# Altium PCB PA_Channel_RF2.PcbDoc
Units mm, origin at the board's own origin, x right, y up, seen from the top; angles counter-clockwise.
Board outline 40.51 x 29.51 mm, 2 copper layers (Top Layer, Bottom Layer), stack 1.071 mm thick; 21 components, 14 nets, 76 pads, 242 vias.
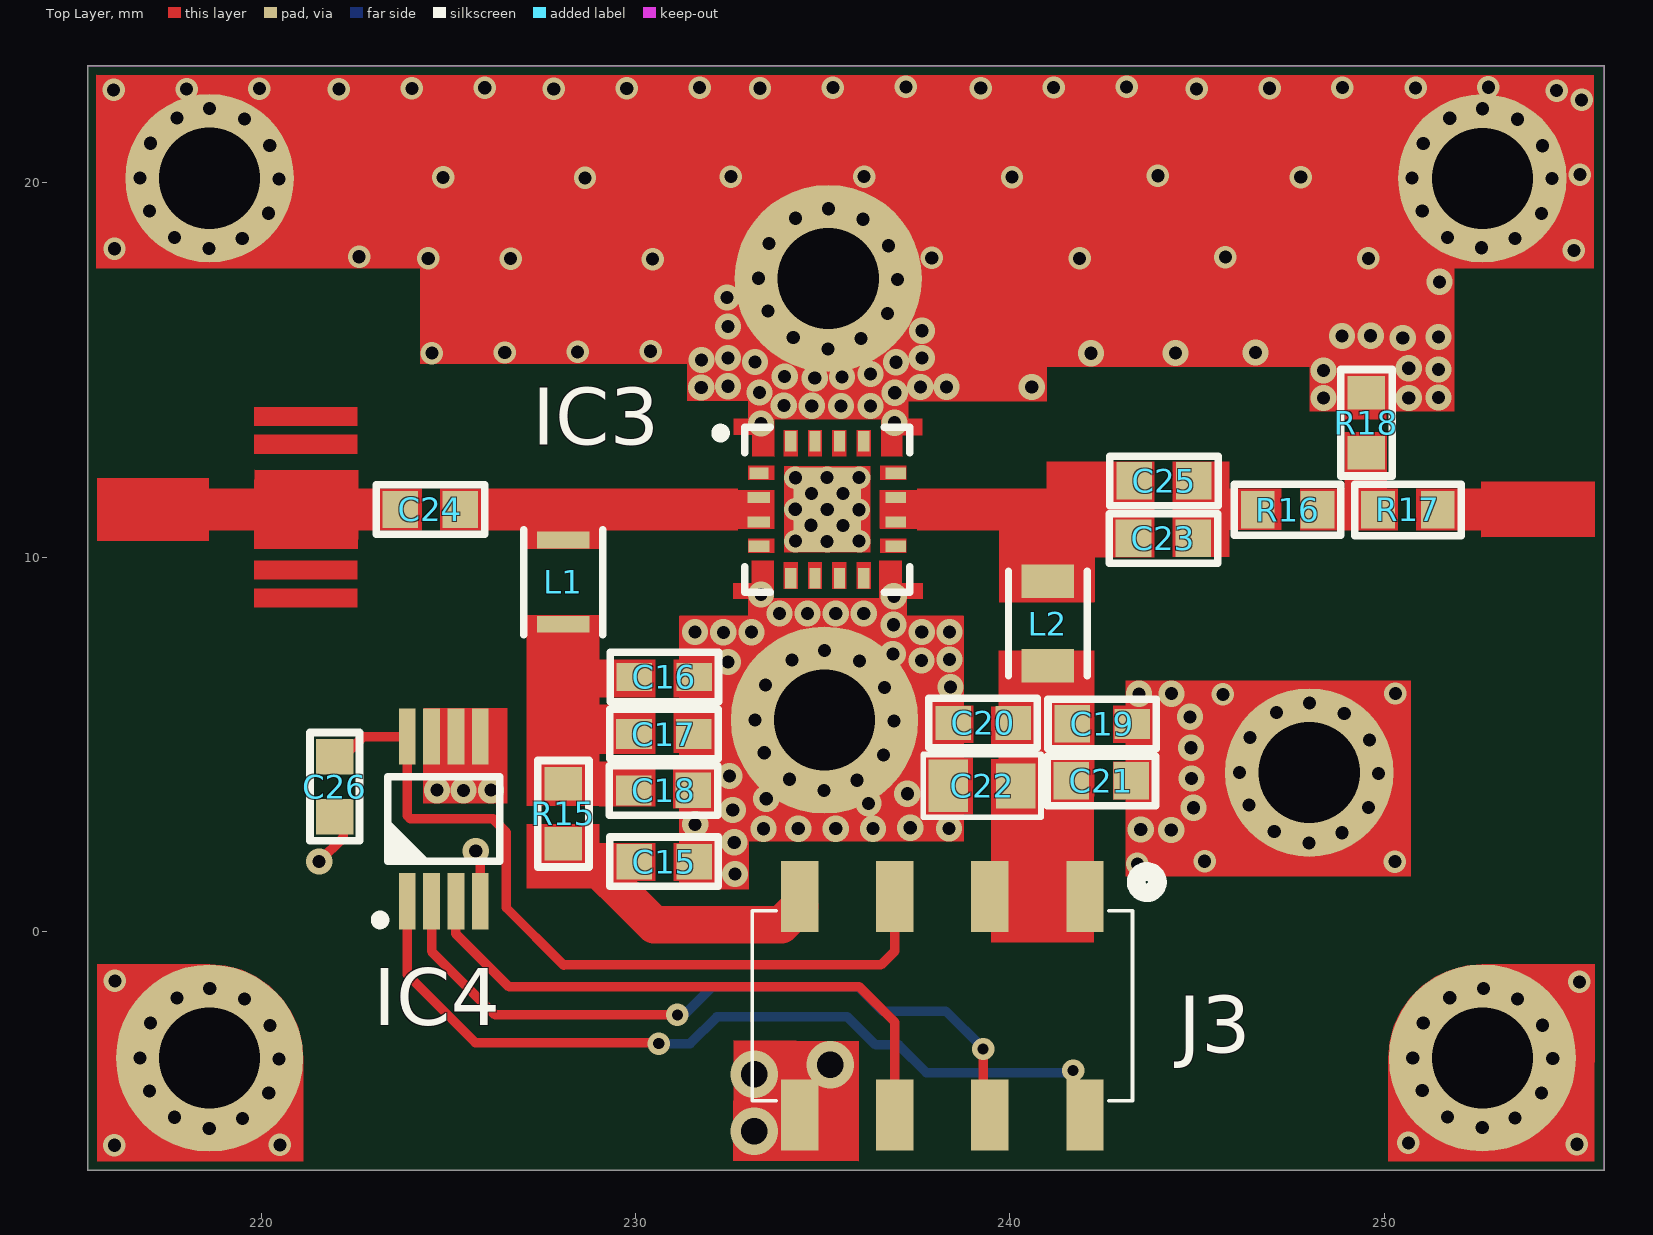
[diagram p0: Top Layer view]
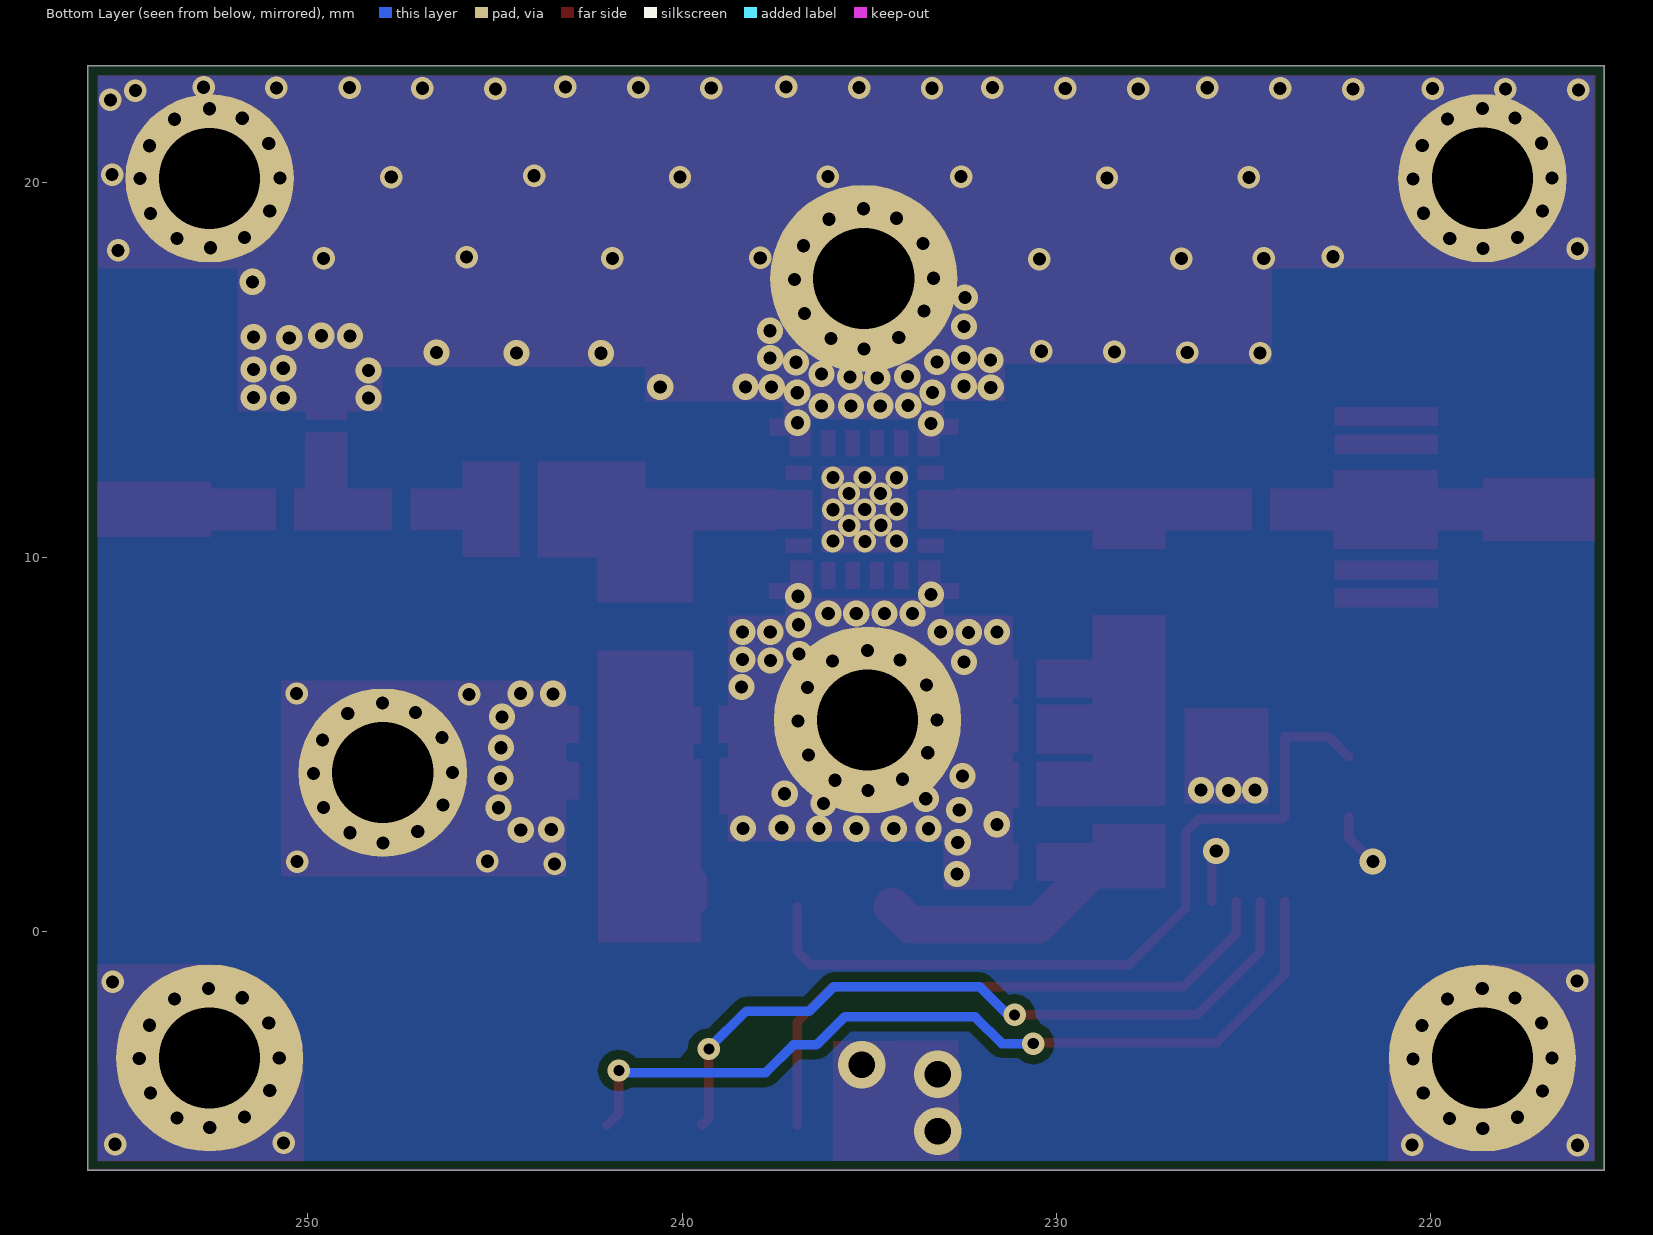
[diagram p1: Bottom Layer view, seen from below]
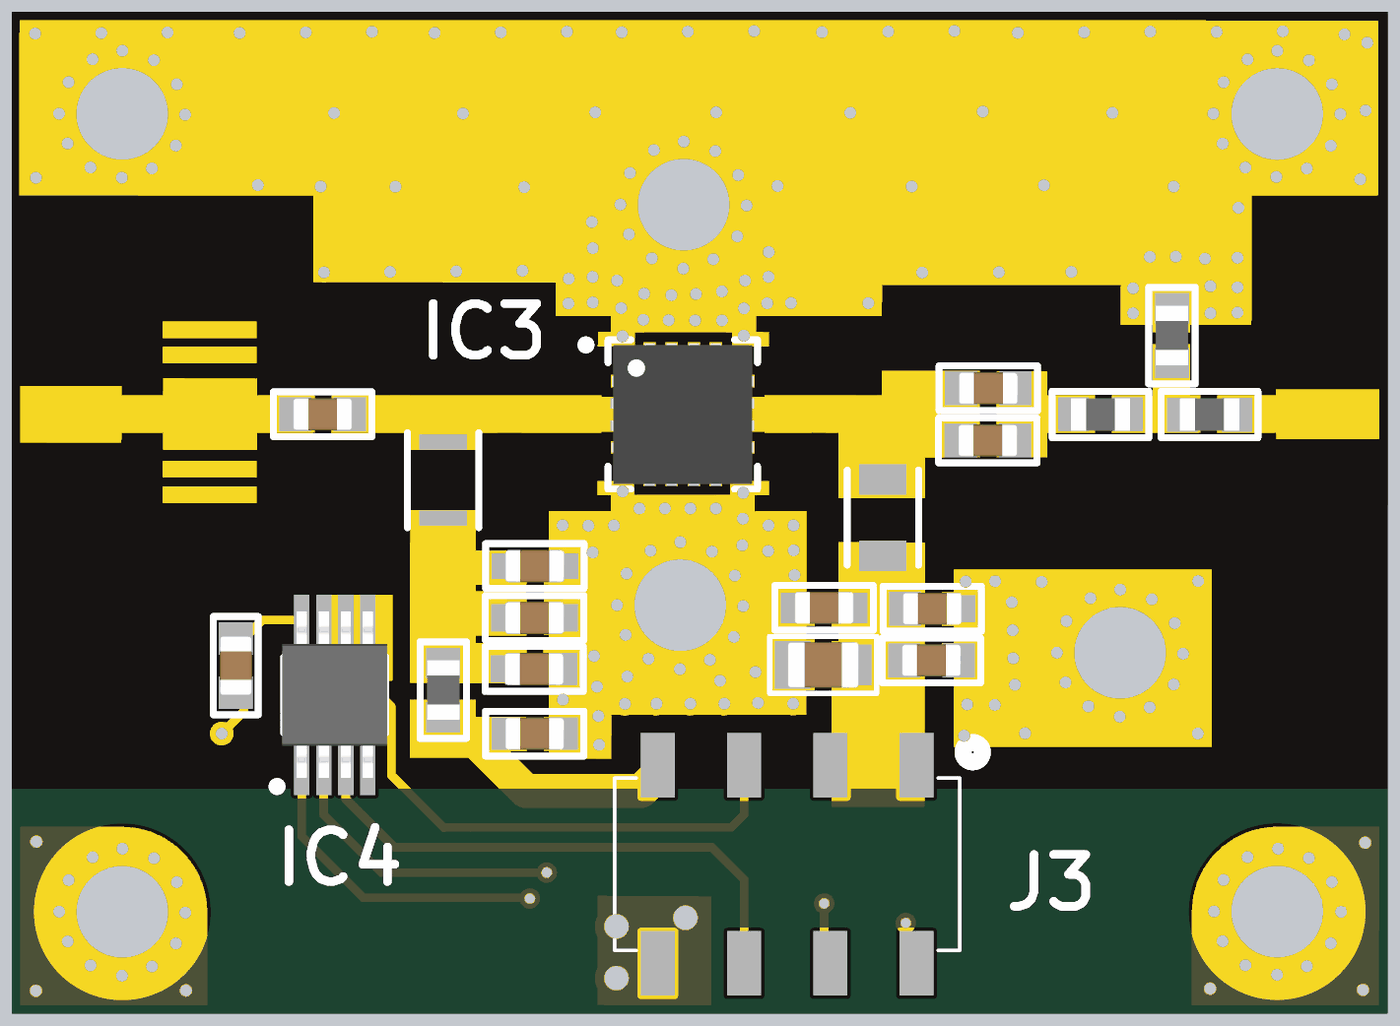
[diagram p2: 3D render of the assembled board from above, using the file's embedded part models]

## Layer stack, top to bottom
Top Solder: solder mask 0.0102, Solder Resist, Dk 3.5
Top Layer: signal copper 0.0356
Dielectric1: core 1, FR-4, Dk 4.8
Bottom Layer: signal copper 0.0356
Bottom Solder: solder mask 0.0102, Solder Resist, Dk 3.5

## Board outline
215.37,-6.375 ccw(c215.375,-6.375) 215.375,-6.38 255.875,-6.38 ccw(c255.875,-6.375) 255.88,-6.375 255.88,23.125 ccw(c255.875,23.125) 255.875,23.13 215.375,23.13 ccw(c215.375,23.125) 215.37,23.125

## Design rules (kind name [scope] priority, off if disabled: settings)
Clearance [All] p1: gap=0.25
HoleSize [All] p1: absolutevalues=TRUE maxlimit=5 minlimit=0.2 maxpercent=80.000 minpercent=20.000
HoleToHoleClearance [All] p1: gap=0.2 allowstackedmicrovias=TRUE
MinimumSolderMaskSliver [All] p1: minsoldermaskwidth=0
PolygonConnect [All] p1: connectstyle=Direct reliefconductorwidth=0.254 reliefentries=4 polygonreliefangle="90 Angle" airgapwidth=0.254
RoomDefinition Power_Stage [InComponentClass('Power_Stage')] p1: confinementstyle=ConfineIn formatcopy=TRUE lockcomponents=FALSE outline -59.9,-122.5 -9.1,-122.5 -9.1,-97.1 -59.9,-97.1
RoutingVias [All] p1: holewidth=0.711 width=1.27 viastyle="Through Hole" minholewidth=0.2 minwidth=0.5 maxholewidth=0.711 maxwidth=1.27
SilkToSolderMaskClearance [IsPad] p1: minsilkscreentomaskgap=0 clearancetoexposedcopper=TRUE
SolderMaskExpansion [All] p1: expansion=0.102
Width [All] p1: maxlimit=2 minlimit=0.152 preferedwidth=0.254
26 further rules are at their usual default settings.

## Components (designator, comment, footprint, x,y, rotation, side; value= is the part's Value field where it differs from the comment)
C15 "4.7u" 0603C#1 230.766,1.868 r0 top
C16 "10n" 0603C#2 230.77,6.805 r0 top
C17 "1n" 0603C#3 230.762,5.278 r0 top
C18 "100p" 0603C#4 230.75,3.773 r0 top
C19 "10n" 0603C#5 242.47,5.548 r0 top
C20 "1n" 0603C#6 239.288,5.575 r180 top
C21 "100p" 0603C#7 242.444,4.028 r0 top
C22 "10u/50V" 0805C 239.26,3.893 r180 top
C23 "680n" 0603C#7 244.106,10.505 r0 top
C24 "680n" 0603C#7 224.522,11.277 r0 top
C25 "1n" 0603C#7 244.12,12.041 r0 top
C26 "10n" 0603C#7 221.968,3.872 r90 top
IC3 "MMWX1" QFN65P400X400X80_HS-17N 235.125,11.27 r0 top
IC4 "MCP9801-M/MS" SOP65P490X110-8N 224.88,3.011 r90 top
J3 "ZL264-8DG" ZL264-8DG 238.2,-1.98 r180 top
L1 "1uH" INDP2520X18L#1 228.071,9.335 r90 top
L2 "1uH" INDP2520X18L#2 241.016,8.231 r90 top
R15 "33" 0603R 228.075,3.15 r270 top
R16 "4.87R" 0603R 247.423,11.27 r0 top
R17 "4.87R" 0603R 250.635,11.266 r0 top
R18 "1k" 0603R 249.528,13.594 r270 top

## Footprints (in the part's own frame and the unit in brackets; to place one, negate y for a bottom-side part, rotate by r counter-clockwise, add the part's x,y. Pads: shape width x height; smd on the part's side, far side on the other; paste and mask are expansions set on the pad)
0603C#1 [mm]
  rect 0.95x0.95 smd: 1(-0.8,0) 2(0.8,0)
  silkscreen extent -1.45,-0.66 1.45,0.66, body extent -0.87,-0.47 0.88,0.48, height 0.87
0603C#2 [mm]
  rect 0.95x0.75 smd: 1(-0.8,0) 2(0.8,0)
  silkscreen extent -1.45,-0.66 1.45,0.66, body extent -0.87,-0.47 0.88,0.48, height 0.87
0603C#3 [mm]
  rect 0.95x0.8 smd: 1(-0.8,0) 2(0.8,0)
  silkscreen extent -1.45,-0.66 1.45,0.66, body extent -0.87,-0.47 0.88,0.48, height 0.87
0603C#4 [mm]
  rect 0.95x0.8 smd: 1(-0.8,0)
  rect 0.95x0.95 smd: 2(0.8,0)
  silkscreen extent -1.45,-0.66 1.45,0.66, body extent -0.87,-0.47 0.88,0.48, height 0.87
0603C#5 [mm]
  rect 0.95x1 smd: 1(-0.8,0)
  rect 0.95x0.8 smd: 2(0.8,0)
  silkscreen extent -1.45,-0.66 1.45,0.66, body extent -0.87,-0.47 0.88,0.48, height 0.87
0603C#6 [mm]
  rect 0.95x0.9 smd: 1(-0.8,0) 2(0.8,0)
  silkscreen extent -1.45,-0.66 1.45,0.66, body extent -0.87,-0.47 0.88,0.48, height 0.87
0603C#7 [mm]
  rect 0.95x1 smd: 1(-0.8,0) 2(0.8,0)
  silkscreen extent -1.45,-0.66 1.45,0.66, body extent -0.87,-0.47 0.88,0.48, height 0.87
0603R [mm]
  rect 0.9x1 smd: 1(-0.8,0) 2(0.8,0)
  silkscreen extent -1.42,-0.69 1.42,0.69, body extent -0.87,-0.47 0.88,0.48, height 0.55
0805C [mm]
  rect 1.05x1.2 smd: 1(-0.9,0)
  rect 1.05x1.4 smd: 2(0.9,0)
  silkscreen extent -1.57,-0.84 1.57,0.84, body extent -1.05,-0.67 1.05,0.68, height 1.25
INDP2520X18L#1 [mm] "Precision Wire Wound Inductor, 2-Leads, Body 2.5x2.0mm, IPC High Density"
  rect 0.45x1.4 smd: 1(-1.125,0) 2(1.125,0)
  silkscreen extent -1.4,-1.05 1.4,1.05, body extent -1.35,-1.05 1.35,1.05, height 1.8
INDP2520X18L#2 [mm] "Precision Wire Wound Inductor, 2-Leads, Body 2.5x2.0mm, IPC High Density"
  rect 0.9x1.4 smd: 1(-1.125,0) 2(1.125,0)
  silkscreen extent -1.4,-1.05 1.4,1.05, body extent -1.35,-1.05 1.35,1.05, height 1.8
QFN65P400X400X80_HS-17N [mm] "QFN, 16-Leads, Body 4.00x4.00mm, Pitch 0.65mm, Thermal Pad 2.25x2.25mm, IPC Medium Density"
  rect 0.5x0.3 smd: 1(-1.825,0.975)
  rect 0.6x0.3 smd: 2(-1.825,0.325) 3(-1.825,-0.325)
  rect 0.55x0.3 smd: 4(-1.825,-0.975) 9(1.825,-0.975) 10(1.825,-0.325) 11(1.825,0.325) 12(1.825,0.975)
  rect 0.3x0.55 smd: 5(-0.975,-1.825) 6(-0.325,-1.825) 7(0.325,-1.825) 8(0.975,-1.825) 13(0.975,1.825) 14(0.325,1.825) 15(-0.325,1.825) 16(-0.975,1.825)
  rect 1.8x2.25 smd: 17(0,0)
  silkscreen extent -2.97,-2.2 2.2,2.2, body extent -2.07,-2.07 2.07,2.07, height 0.8
SOP65P490X110-8N [mm] "SOP, 0.65mm pitch; 8 pin, 3.00mm W X 3.00mm L X 1.10mm H body, IPC Medium Density"
  rect 1.5x0.45 smd: 1(-2.2,0.975) 2(-2.2,0.325) 3(-2.2,-0.325) 4(-2.2,-0.975) 5(2.2,-0.975) 6(2.2,-0.325) 7(2.2,0.325) 8(2.2,0.975)
  silkscreen extent -2.82,-1.5 1.12,1.82, body extent -2.45,-1.55 2.45,1.55, height 1.1
ZL264-8DG [mm]
  rect 1x1.9 smd: 1(-3.81,-2.921) 2(-3.81,2.921) 3(-1.27,-2.921) 4(-1.27,2.921) 5(1.27,-2.921) 6(1.27,2.921) 7(3.81,-2.921) 8(3.81,2.921)
  silkscreen extent -5.74,-3.59 5.08,2.54, body extent -5.08,-3.56 5.08,3.56, height 7.5

## Part data
C15 C16 C17 C18 C19 C20 C21 C23 C24 C25 C26: library part CAP_SMD_0603, "Capacitor SMD"
C22: library part CAP_SMD_0805, "Capacitor SMD"
IC3: library part RF_NPA1003QA
IC4: "2-Wire High-Accuracy Temperature Sensor"
J3: library part "CON_2X4 2.54 SMT FEM", "2.54mm pitch connector"
L2: "100uH, 60mA, 21R"
R15 R16 R17 R18: library part RES_0603, "SMD Resistor"

## Free pads (board coordinates)
  round 5 hole 2.7 unplated: 2(235.05,5.65) 6(218.626,-3.38) 6(252.625,-3.375) 13(235.15,17.45)
  round 4.5 hole 2.7 unplated: 4(248,4.25) 6(218.623,20.125) 6(252.625,20.122)

## Via types
v1: diameter 0.7, hole 0.35, Top Layer to Bottom Layer, tented both sides, 167 vias
v2: diameter 0.6, hole 0.35, Top Layer to Bottom Layer, tented both sides, 68 vias
v3: diameter 0.6, hole 0.3, Top Layer to Bottom Layer, tented both sides, 4 vias
v4: diameter 1.27, hole 0.711, Top Layer to Bottom Layer, tented both sides, 3 vias

## Nets (pads, with @x,y where several pads share a name; then routed paths per layer and width w, separated by ;. In a path a pad name is that pad's centre, name@x,y a point inside that pad or via, vN(x,y) a via of type N, cw(c..) or ccw(c..) an arc to the next point about the centre after c; other vN are vias at no path point)
ALERT: IC4.3 J3.6 | length 16.3
  Top Layer w0.254: IC4.3 225.205,-0.059 226.623,-1.477 235.985,-1.477 236.93,-2.422 J3.6@236.93,-5.171
GND: C15.2 C16.2 C17.2 C18.2 C19.2 C20.2 C21.2 C22.2 C26.1 IC3.17 IC4.4 IC4.5 IC4.6 IC4.7 J3.8 pad.2 pad.4 pad.6 pad.13 R18.1 | length 4.1
  Top Layer w0.254: v1(221.551,1.87) 222.2,2.519 C26.1@222.2,3.071 ; v1(225.733,2.153) 225.855,2.031 IC4.4
  Top Layer w1: v4(233.172,-5.334) 234.227,-5.334 J3.8@234.39,-5.171
  other v1: 218.616,-5.261 252.621,-5.235 219.498,-4.988 253.498,-4.982 217.692,-4.959 251.691,-4.954 220.205,-4.314 254.204,-4.308 217.018,-4.253 251.017,-4.247 220.479,-3.405 216.765,-3.376 250.765,-3.371 254.506,-3.384 220.233,-2.507 254.232,-2.502 217.046,-2.446 251.046,-2.441 219.559,-1.801 253.559,-1.795 217.753,-1.773 251.752,-1.767 218.629,-1.52 252.65,-1.521 232.663,1.54 247.99,2.369 232.64,2.385 248.873,2.643 247.066,2.671 243.499,2.727 244.313,2.716 233.422,2.747 234.35,2.75 235.35,2.75 236.35,2.75 238.376,2.753 237.341,2.775 231.596,2.866 232.6,3.25 244.905,3.308 249.579,3.316 246.393,3.377 236.222,3.428 233.494,3.55 237.263,3.683 225.409,3.775 235.04,3.769 224.701,3.779 226.138,3.779 235.923,4.043 234.116,4.071 244.855,4.089 232.515,4.154 249.854,4.225 246.14,4.254 236.629,4.716 233.443,4.777 244.838,4.913 249.608,5.123 246.421,5.184 236.904,5.625 233.19,5.654 244.811,5.738 248.934,5.829 247.127,5.858 248.004,6.11 243.454,6.352 244.321,6.356 236.658,6.523 238.415,6.539 233.471,6.584 232.474,7.205 235.984,7.229 237.641,7.247 234.177,7.258 238.391,7.268 236.875,7.419 235.054,7.51 231.588,8.007 232.348,7.995 233.1,8 237.648,8.003 238.387,8.003 236.896,8.199 233.85,8.5 234.6,8.5 235.35,8.5 236.1,8.5 236.903,8.958 233.356,9.004 233.351,13.576 236.921,13.595 233.964,14.057 234.711,14.046 235.488,14.039 236.281,14.038 248.382,14.251 250.659,14.251 251.456,14.271 233.313,14.404 236.928,14.394 231.758,14.539 232.476,14.569 237.611,14.547 238.311,14.554 240.587,14.55 234.79,14.785 235.515,14.819 233.987,14.83 236.279,14.896 248.382,14.988 251.456,15.015 250.659,15.049 233.19,15.217 236.959,15.211 231.768,15.267 232.471,15.322 237.651,15.322 242.173,15.45 244.43,15.46 246.566,15.469 235.14,15.569 236.023,15.843 250.499,15.859 234.216,15.871 251.456,15.886 248.878,15.912 249.641,15.919 237.657,16.053 232.476,16.169 236.729,16.516 233.543,16.577 232.449,16.938 251.483,17.359 237.004,17.425 233.29,17.454 218.613,18.244 252.6,18.268 236.758,18.323 233.571,18.384 219.495,18.518 253.498,18.515 217.689,18.546 251.691,18.543 236.084,19.029 234.277,19.058 220.202,19.192 254.204,19.188 217.015,19.253 251.018,19.249 235.154,19.31 220.476,20.101 216.763,20.129 250.744,20.132 254.485,20.118 254.233,20.995 220.23,20.998 217.043,21.059 251.046,21.056 219.556,21.705 253.559,21.701 217.75,21.733 251.752,21.73 218.626,21.986 252.629,21.982
  other v2: 216.082,-5.706 220.502,-5.697 255.15,-5.68 250.65,-5.643 255.216,-1.344 216.095,-1.315 243.408,1.809 245.203,1.879 250.289,1.872 245.691,6.337 250.3,6.361 234.273,10.43 235.118,10.427 235.973,10.43 234.695,10.857 235.542,10.848 234.27,11.284 235.125,11.277 235.97,11.27 234.7,11.702 235.545,11.706 234.274,12.126 235.122,12.131 235.975,12.13 224.561,15.454 226.509,15.471 228.457,15.488 230.405,15.505 230.459,17.964 224.465,17.984 226.667,17.979 237.916,18 241.865,17.986 249.579,17.983 245.761,18.02 222.617,18.028 255.07,18.197 216.084,18.242 224.861,20.15 228.653,20.135 240.059,20.157 247.773,20.154 232.549,20.169 236.11,20.171 243.955,20.191 255.23,20.223 255.277,22.221 254.606,22.467 216.06,22.488 218.008,22.505 222.079,22.509 227.819,22.511 244.991,22.513 219.956,22.522 224.027,22.526 225.975,22.543 229.767,22.528 231.715,22.545 233.328,22.53 239.225,22.533 246.939,22.53 250.84,22.54 235.276,22.547 237.224,22.564 241.173,22.55 243.121,22.567 248.887,22.547 252.788,22.557
  other v4: 233.172,-3.81 235.204,-3.556
NetC16_1: C16.1 C17.1 C18.1 L1.1 R15.1
NetC23_1: C23.1 C25.1 IC3.10 IC3.11 L2.2
NetC23_2: C23.2 C25.2 R16.1
NetC24_1: C24.1
NetC24_2: C24.2 IC3.2 IC3.3 L1.2
NetR16_2: R16.2 R17.1 R18.2
NetR17_2: R17.2
P3V3: C26.2 IC4.8 J3.5 | length 21.3
  Top Layer w0.254: C26.2@222.2,4.671 222.74,5.211 IC4.8 223.905,3.096 223.988,3.013 226.195,3.013 226.548,2.66 226.548,0.639 228.09,-0.903 228.09,-0.891 236.559,-0.891 236.93,-0.52 J3.5@236.93,0.671
SCK: IC4.2 J3.4 | length 19.9
  Top Layer w0.254: IC4.2 224.555,-0.527 226.253,-2.225 v3(231.121,-2.225) ; v3(239.288,-3.136) 239.288,-4.989 239.47,-5.171 J3.4@239.492,-5.149
  Bottom Layer w0.254: v3(231.121,-2.225) 231.299,-2.225 232.054,-1.47 235.947,-1.47 236.601,-2.124 238.291,-2.124 239.28,-3.113 239.28,-3.128 v3(239.288,-3.136)
SDA: IC4.1 J3.2 | length 23
  Top Layer w0.254: IC4.1 223.905,-1.147 225.727,-2.969 v3@230.61,-2.969 ; v3(241.69,-3.71) 241.69,-4.851 J3.2@242.01,-5.171
  Bottom Layer w0.254: v3(230.622,-2.99) 231.46,-2.99 232.174,-2.276 235.664,-2.276 236.414,-3.026 237.028,-3.026 237.77,-3.768 241.632,-3.768 v3(241.69,-3.71)
VCC_PWRAMP: C19.1 C20.1 C21.1 C22.1 J3.1 J3.3 L2.1 | length 7
  Top Layer w0.254: J3.3@239.47,0.671 239.47,1.47 240.16,2.16 C22.1 ; C21.1 241.644,1.606 242.01,1.24 J3.1@242.01,0.671
VCC_PWRAMPIN: C15.1 J3.7 R15.2 | length 7.4
  Top Layer w0.254: R15.2 R15.2@228.333,2.35
  Top Layer w1: R15.2@228.333,2.35 230.503,0.18 233.899,0.18 J3.7@234.39,0.671
pads on no net: IC3.1 IC3.4 IC3.5 IC3.6 IC3.7 IC3.8 IC3.9 IC3.12 IC3.13 IC3.14 IC3.15 IC3.16

## Polygon pours and split planes (outlines as drawn)
GND on Bottom Layer "L3-No Net" (solid, remove dead copper, pour order 16): 213.354,25.03 258.133,25.03 258.133,-6.882 213.384,-6.714
no net on Top Layer "Top Layer-No Net 7" (none, pour order 9): 247.052,3.725 246.971,3.898 246.922,4.082 246.905,4.272 246.922,4.462 246.971,4.646 247.052,4.819 247.161,4.976 247.296,5.111 247.453,5.22 247.626,5.301 247.81,5.35 248,5.367 248.19,5.35 248.374,5.301 248.547,5.22 248.704,5.111 248.839,4.976 248.948,4.819 249.029,4.646 249.078,4.462 249.095,4.272 249.078,4.082 249.029,3.898 248.948,3.725 248.839,3.568 248.704,3.433 248.547,3.324 248.374,3.243 248.19,3.194 248,3.177 247.81,3.194 247.626,3.243 247.453,3.324 247.296,3.433 247.161,3.568
no net on Top Layer "Top Layer-No Net 7" (none, pour order 14): 234.102,5.125 234.021,5.298 233.972,5.482 233.955,5.672 233.972,5.862 234.021,6.046 234.102,6.219 234.211,6.376 234.346,6.511 234.503,6.62 234.676,6.701 234.86,6.75 235.05,6.767 235.24,6.75 235.424,6.701 235.597,6.62 235.754,6.511 235.889,6.376 235.998,6.219 236.079,6.046 236.128,5.862 236.145,5.672 236.128,5.482 236.079,5.298 235.998,5.125 235.889,4.968 235.754,4.833 235.597,4.724 235.424,4.643 235.24,4.594 235.05,4.577 234.86,4.594 234.676,4.643 234.503,4.724 234.346,4.833 234.211,4.968
no net on Top Layer "Top Layer-No Net 7" (none, pour order 15): 234.202,16.925 234.121,17.098 234.072,17.282 234.055,17.472 234.072,17.662 234.121,17.846 234.202,18.019 234.311,18.176 234.446,18.311 234.603,18.42 234.776,18.501 234.96,18.55 235.15,18.567 235.34,18.55 235.524,18.501 235.697,18.42 235.854,18.311 235.989,18.176 236.098,18.019 236.179,17.846 236.228,17.662 236.245,17.472 236.228,17.282 236.179,17.098 236.098,16.925 235.989,16.768 235.854,16.633 235.697,16.524 235.524,16.443 235.34,16.394 235.15,16.377 234.96,16.394 234.776,16.443 234.603,16.524 234.446,16.633 234.311,16.768
no net on Top Layer "Top Layer-No Net 7" (none, pour order 13): 217.674,19.6 217.594,19.773 217.545,19.957 217.528,20.147 217.545,20.337 217.594,20.522 217.674,20.695 217.784,20.851 217.919,20.986 218.075,21.096 218.248,21.176 218.433,21.225 218.623,21.242 218.813,21.225 218.997,21.176 219.17,21.096 219.326,20.986 219.461,20.851 219.571,20.695 219.652,20.522 219.7,20.337 219.717,20.147 219.7,19.957 219.652,19.773 219.571,19.6 219.461,19.444 219.326,19.309 219.17,19.199 218.997,19.118 218.813,19.07 218.623,19.053 218.433,19.07 218.248,19.118 218.075,19.199 217.919,19.309 217.784,19.444
no net on Top Layer "Top Layer-No Net 7" (none, pour order 12): 217.677,-3.905 217.597,-3.732 217.548,-3.548 217.531,-3.358 217.548,-3.168 217.597,-2.984 217.677,-2.811 217.787,-2.654 217.922,-2.519 218.078,-2.41 218.251,-2.329 218.435,-2.28 218.626,-2.263 218.816,-2.28 219,-2.329 219.173,-2.41 219.329,-2.519 219.464,-2.654 219.574,-2.811 219.654,-2.984 219.703,-3.168 219.72,-3.358 219.703,-3.548 219.654,-3.732 219.574,-3.905 219.464,-4.062 219.329,-4.197 219.173,-4.306 219,-4.387 218.816,-4.436 218.626,-4.453 218.435,-4.436 218.251,-4.387 218.078,-4.306 217.922,-4.197 217.787,-4.062
no net on Top Layer "Top Layer-No Net 7" (none, pour order 11): 253.15,-4.323 252.977,-4.403 252.793,-4.452 252.603,-4.469 252.413,-4.452 252.229,-4.403 252.056,-4.323 251.899,-4.213 251.764,-4.078 251.655,-3.922 251.574,-3.749 251.525,-3.565 251.508,-3.375 251.525,-3.184 251.574,-3 251.655,-2.827 251.764,-2.671 251.899,-2.536 252.056,-2.426 252.229,-2.346 252.413,-2.297 252.603,-2.28 252.793,-2.297 252.977,-2.346 253.15,-2.426 253.307,-2.536 253.442,-2.671 253.551,-2.827 253.632,-3 253.681,-3.184 253.698,-3.375 253.681,-3.565 253.632,-3.749 253.551,-3.922 253.442,-4.078 253.307,-4.213
no net on Top Layer "Top Layer-No Net 7" (none, pour order 10): 252.1,21.07 252.273,21.151 252.457,21.2 252.647,21.217 252.837,21.2 253.021,21.151 253.194,21.07 253.351,20.961 253.486,20.826 253.595,20.669 253.676,20.496 253.725,20.312 253.742,20.122 253.725,19.932 253.676,19.748 253.595,19.575 253.486,19.418 253.351,19.283 253.194,19.174 253.021,19.093 252.837,19.044 252.647,19.027 252.457,19.044 252.273,19.093 252.1,19.174 251.943,19.283 251.808,19.418 251.699,19.575 251.618,19.748 251.569,19.932 251.552,20.122 251.569,20.312 251.618,20.496 251.699,20.669 251.808,20.826 251.943,20.961

## Keep-outs
Keep-Out Layer:
  lines w0.01: 215.375,-6.375 215.375,23.125 ; 215.375,-6.375 255.875,-6.375 255.875,23.125 215.375,23.125 ; 215.375,-6.375 215.375,23.125

## Other copper
Top Layer:
  region: 236.539,12.07 236.539,12.44 237.239,12.44 237.239,12.07
  region: 236.539,12.07 236.539,12.44 237.239,12.44 237.239,12.07
  region: 233.964,12.695 233.964,13.395 234.334,13.395 234.334,12.695
  region: 234.614,12.695 234.614,13.395 234.984,13.395 234.984,12.695
  region: 235.264,12.695 235.264,13.395 235.634,13.395 235.634,12.695
  region: 235.914,12.695 235.914,13.395 236.284,13.395 236.284,12.695
  region: 233.964,12.695 233.964,13.395 234.334,13.395 234.334,12.695
  region: 234.614,12.695 234.614,13.395 234.984,13.395 234.984,12.695
  region: 235.264,12.695 235.264,13.395 235.634,13.395 235.634,12.695
  region: 235.914,12.695 235.914,13.395 236.284,13.395 236.284,12.695
  region net GND: 238.019,5.04 239.019,5.04 239.019,6.04 238.019,6.04
  region: 233.964,9.165 233.964,9.865 234.334,9.865 234.334,9.165
  region: 234.614,9.165 234.614,9.865 234.984,9.865 234.984,9.165
  region: 235.264,9.165 235.264,9.865 235.634,9.865 235.634,9.165
  region: 235.914,9.165 235.914,9.865 236.284,9.865 236.284,9.165
  region: 233.009,10.12 233.009,10.49 233.709,10.49 233.709,10.12
  region: 236.539,10.12 236.539,10.49 237.239,10.49 237.239,10.12
  region: 233.009,12.07 233.009,12.44 233.709,12.44 233.709,12.07
  region net GND: 233.974,10.13 233.974,12.43 236.274,12.43 236.274,10.13
  region: 219.814,13.518 222.574,13.518 222.574,14.014 219.814,14.014
  region: 219.814,12.772 219.814,13.268 222.574,13.268 222.574,12.772
  region: 219.815,9.407 222.575,9.407 222.575,9.903 219.815,9.903
  region: 219.815,8.661 219.815,9.157 222.575,9.157 222.575,8.661
  region net GND: 231.029,6.26 231.029,7.26 232.029,7.26 232.029,6.26
  region net GND: 231.028,4.782 232.028,4.782 232.028,6.062 231.028,6.062
  region net GND: 231.015,3.29 231.015,4.537 232.015,4.537 232.015,3.29
  region net GND: 231.029,1.36 232.029,1.36 232.029,2.36 231.029,2.36
  region: 233.964,9.165 233.964,9.865 234.334,9.865 234.334,9.165
  region: 234.614,9.165 234.614,9.865 234.984,9.865 234.984,9.165
  region: 235.264,9.165 235.264,9.865 235.634,9.865 235.634,9.165
  region: 235.914,9.165 235.914,9.865 236.284,9.865 236.284,9.165
  region: 233.009,10.12 233.009,10.49 233.709,10.49 233.709,10.12
  region: 236.539,10.12 236.539,10.49 237.239,10.49 237.239,10.12
  region: 233.009,12.07 233.009,12.44 233.709,12.44 233.709,12.07
  region net GND: 233.974,10.13 233.974,12.43 236.274,12.43 236.274,10.13
  region net GND: 238.012,3.141 239.012,3.141 239.012,4.641 238.012,4.641
  region net GND: 231.029,1.36 232.029,1.36 232.029,2.36 231.029,2.36
  region net GND: 231.029,1.36 232.029,1.36 232.029,2.36 231.029,2.36
  region net GND: 242.759,5.04 243.759,5.04 243.759,6.04 242.759,6.04
  region net GND: 242.759,3.54 243.759,3.54 243.759,4.54 242.759,4.54
  region net GND: 243.096,1.476 243.096,6.703 250.705,6.703 250.705,4.502 250.705,1.476
  region net NetC23_2: 244.359,10.01 244.359,12.55 245.859,12.55 245.859,10.01
  region net GND: 248.959,13.69 250.059,13.69 250.059,14.19 248.959,14.19
  region net NetC23_2: 245.859,10.73 247.259,10.73 247.259,11.83 245.859,11.83
  region net NetC16_1: 227.093,3.36 229.029,3.355 230.526,3.355 230.532,4.536 229.034,4.542 229.034,4.754 230.527,4.754 230.534,6.06 229.034,6.065 229.034,6.255 230.529,6.255 230.534,7.26 229.034,7.265 229.034,8.45 227.099,8.455
  region net VCC_PWRAMP: 239.51,3.103 239.51,-0.283 242.248,-0.289 242.255,7.501 239.71,7.507 239.705,6.007 239.51,6.007 239.505,5.001 239.705,4.996 239.705,4.598 239.509,4.598
  region net NetC23_2: 245.859,10.73 247.259,10.73 247.259,11.83 245.859,11.83
  region net GND: 248.959,13.69 250.059,13.69 250.059,14.19 248.959,14.19
  region net NetC23_2: 244.359,10.01 244.359,12.55 245.859,12.55 245.859,10.01
  region net GND: 224.331,3.423 226.582,3.423 226.582,5.961 224.339,5.961
  region net GND: 235.966,-6.137 235.966,-2.924 232.622,-2.907 232.613,-6.127
  region net NetC24_1: 215.624,10.442 218.598,10.44 218.603,10.725 219.823,10.725 219.823,10.23 222.589,10.225 222.594,10.725 224.289,10.725 224.294,11.83 222.594,11.835 222.594,12.33 219.829,12.335 219.823,11.835 218.603,11.835 218.603,12.115 215.624,12.115
  region net NetR17_2: 252.598,10.54 252.592,10.725 250.859,10.725 250.853,11.83 252.592,11.835 252.592,12.015 255.626,12.015 255.626,10.542
  region net GND: 250.108,-6.131 255.62,-6.133 255.63,-0.875 252.613,-0.875 252.179,-0.913 251.757,-1.027 251.361,-1.211 251.003,-1.461 250.695,-1.77 250.444,-2.128 250.26,-2.523 250.146,-2.945 250.108,-3.38
  region net GND: 215.619,-6.131 221.123,-6.133 221.128,-3.378 221.09,-2.943 220.977,-2.521 220.793,-2.125 220.542,-1.768 220.234,-1.459 219.876,-1.208 219.48,-1.024 219.058,-0.91 218.623,-0.872 215.624,-0.872
  region net GND: 232.622,13.27 233.122,13.265 233.122,12.695 233.708,12.69 233.713,13.69 236.572,13.69 236.572,12.695 237.128,12.69 237.133,13.265 237.658,13.265 237.663,13.695 237.283,13.7 237.283,14.17 240.989,14.17 240.994,15.087 248.012,15.087 248.012,13.906 251.868,13.901 251.873,17.719 255.598,17.719 255.603,22.872 249.683,22.878 215.598,22.884 215.592,17.724 224.252,17.719 224.252,15.165 231.382,15.16 231.382,14.175 233.012,14.17 233.012,13.7 232.628,13.7
  region net NetC24_2: 227.093,10.23 227.093,10.725 224.789,10.725 cw(c224.789,10.73) 224.783,10.73 224.783,11.83 cw(c224.789,11.83) 224.789,11.835 232.729,11.835 cw(c232.729,11.83) 232.734,11.83 232.734,11.795 233.709,11.795 cw(c233.709,11.79) 233.714,11.79 233.714,10.77 cw(c233.709,10.77) 233.709,10.765 232.734,10.765 232.734,10.73 cw(c232.729,10.73) 232.729,10.725 229.034,10.725 229.034,10.23 cw(c229.029,10.23) 229.029,10.225 227.099,10.225 cw(c227.099,10.23)
  region net VCC_PWRAMPIN: 227.093,1.16 ccw(c227.099,1.16) 227.099,1.155 229.029,1.155 ccw(c229.029,1.16) 229.034,1.16 229.034,1.355 230.529,1.355 ccw(c230.529,1.36) 230.534,1.36 230.534,2.36 ccw(c230.529,2.36) 230.529,2.365 229.034,2.365 229.034,2.86 ccw(c229.029,2.86) 229.029,2.865 227.099,2.865 ccw(c227.099,2.86) 227.093,2.86
  region net GND: 231.177,1.135 231.177,8.426 cw(c231.182,8.426) 231.182,8.432 233.014,8.432 233.014,8.894 232.614,8.894 cw(c232.614,8.899) 232.609,8.899 232.609,9.304 cw(c232.614,9.304) 232.614,9.31 233.104,9.31 233.104,9.896 cw(c233.109,9.896) 233.109,9.902 233.69,9.902 cw(c233.69,9.896) 233.695,9.896 233.695,8.905 236.515,8.905 236.515,9.896 cw(c236.52,9.896) 236.52,9.902 237.109,9.902 cw(c237.109,9.896) 237.114,9.896 237.114,9.31 237.664,9.31 cw(c237.664,9.304) 237.669,9.304 237.669,8.899 cw(c237.664,8.899) 237.664,8.894 237.248,8.894 237.248,8.432 238.762,8.432 cw(c238.762,8.426) 238.767,8.426 238.767,3.33 239,3.33 cw(c239,3.324) 239.005,3.324 cw(c239,3.324) 239,3.319 238.767,3.319 238.767,2.421 cw(c238.762,2.421) 238.762,2.416 233.024,2.416 233.024,1.135 cw(c233.019,1.135) 233.019,1.13 231.182,1.13 cw(c231.182,1.135)
  region net NetC23_1: 237.533,10.73 237.533,10.765 236.539,10.765 cw(c236.539,10.77) 236.533,10.77 236.533,11.79 cw(c236.539,11.79) 236.539,11.795 237.533,11.795 237.533,11.83 cw(c237.539,11.83) 237.539,11.835 240.983,11.835 240.983,12.55 cw(c240.989,12.55) 240.989,12.555 243.859,12.555 cw(c243.859,12.55) 243.864,12.55 243.864,10.01 cw(c243.859,10.01) 243.859,10.005 242.264,10.005 242.264,8.81 cw(c242.259,8.81) 242.259,8.805 239.719,8.805 cw(c239.719,8.81) 239.713,8.81 239.713,10.725 237.539,10.725 cw(c237.539,10.73)
  region net NetR16_2: 247.753,10.73 247.753,11.83 cw(c247.759,11.83) 247.759,11.835 248.953,11.835 248.953,13.33 cw(c248.959,13.33) 248.959,13.335 250.059,13.335 cw(c250.059,13.33) 250.064,13.33 250.064,11.835 250.359,11.835 cw(c250.359,11.83) 250.364,11.83 250.364,10.73 cw(c250.359,10.73) 250.359,10.725 247.759,10.725 cw(c247.759,10.73)
  region net NetC23_1: 237.533,10.73 237.533,10.765 236.539,10.765 cw(c236.539,10.77) 236.533,10.77 236.533,11.79 cw(c236.539,11.79) 236.539,11.795 237.533,11.795 237.533,11.83 cw(c237.539,11.83) 237.539,11.835 240.983,11.835 240.983,12.55 cw(c240.989,12.55) 240.989,12.555 243.859,12.555 cw(c243.859,12.55) 243.864,12.55 243.864,10.01 cw(c243.859,10.01) 243.859,10.005 242.264,10.005 242.264,8.81 cw(c242.259,8.81) 242.259,8.805 239.719,8.805 cw(c239.719,8.81) 239.713,8.81 239.713,10.725 237.539,10.725 cw(c237.539,10.73)

## Silkscreen, mask and mechanical layers (free items; w line width, h text height)
Top Solder:
  rectangle: 215.125,0.25 256.023,23.483
  rectangle: 215.25,3.35 228.1,8.75
  region: 244.358,9.966 245.858,9.966 245.858,10.613 247.258,10.613 247.259,11.895 245.859,11.895 245.859,12.615 244.358,12.615
  region: 227.098,10.128 227.098,10.715 224.488,10.715 224.488,11.895 232.728,11.895 232.729,11.855 233.708,11.855 233.709,10.717 232.729,10.716 229.029,10.715 229.029,10.128
  region: 230.769,7.052 239.793,7.052 239.793,9.366 239.793,11.667 239.793,16.172 235.083,16.172 230.769,16.172
  region: 226.797,1.06 245.074,1.06 245.074,10.18 231.111,10.18 226.797,10.18
  region: 237.538,10.795 237.538,10.835 236.538,10.835 cw(c236.538,10.835) 236.538,10.835 236.538,11.855 cw(c236.538,11.855) 236.538,11.855 237.538,11.855 237.538,11.895 cw(c237.538,11.895) 237.538,11.895 240.988,11.895 240.988,12.615 cw(c240.988,12.615) 240.988,12.615 243.858,12.615 cw(c243.858,12.615) 243.859,12.615 243.859,10.075 cw(c243.858,10.075) 243.858,10.075 239.718,10.075 cw(c239.718,10.075) 239.718,10.075 239.718,10.795 237.538,10.795 cw(c237.538,10.795)
Bottom Solder:
  region: 234.161,1.179 236.919,-1.659 242.029,3.307 239.271,6.144
  region: 239.794,-1.659 239.794,1.216 236.919,1.216 236.919,-1.659
  region: 228.274,-0.832 229.948,-2.556 231.769,-0.786 230.095,0.937
  rectangle: 215.375,-1 255.875,23.625
  rectangle: 215.375,-6.38 230,0.75
  rectangle: 230,-6.375 248,-4.375
  rectangle: 242.25,-6.375 255.875,0.75
  region: 237.265,-0.277 240.023,-3.115 245.133,1.851 242.375,4.688
  rectangle: 240.023,-3.115 253.648,4.01
  rectangle: 222,-5.875 235.625,-3.875
  region: 233.554,-4.645 235.229,-6.368 237.049,-4.598 235.375,-2.875
  region: 231.184,-4.154 232.939,-5.959 234.255,-4.681 232.5,-2.875
  region: 235.375,-5.75 235.375,-2.875 232.5,-2.875 232.5,-5.75
Mechanical 1:
  lines w0.01: 215.375,-6.375 215.375,23.125 ; 215.375,-6.375 255.875,-6.375 255.875,23.125 215.375,23.125 ; 215.375,-6.375 215.375,23.125